# Altium PCB RD.PcbDoc (part 1 of 2)
Units mm, origin at the board's own origin, x right, y up, seen from the top; angles counter-clockwise.
Board outline 101.86 x 119 mm, 4 copper layers (Top Layer, VCC, GND, Bottom Layer); 150 components, 96 nets, 593 pads, 207 vias.
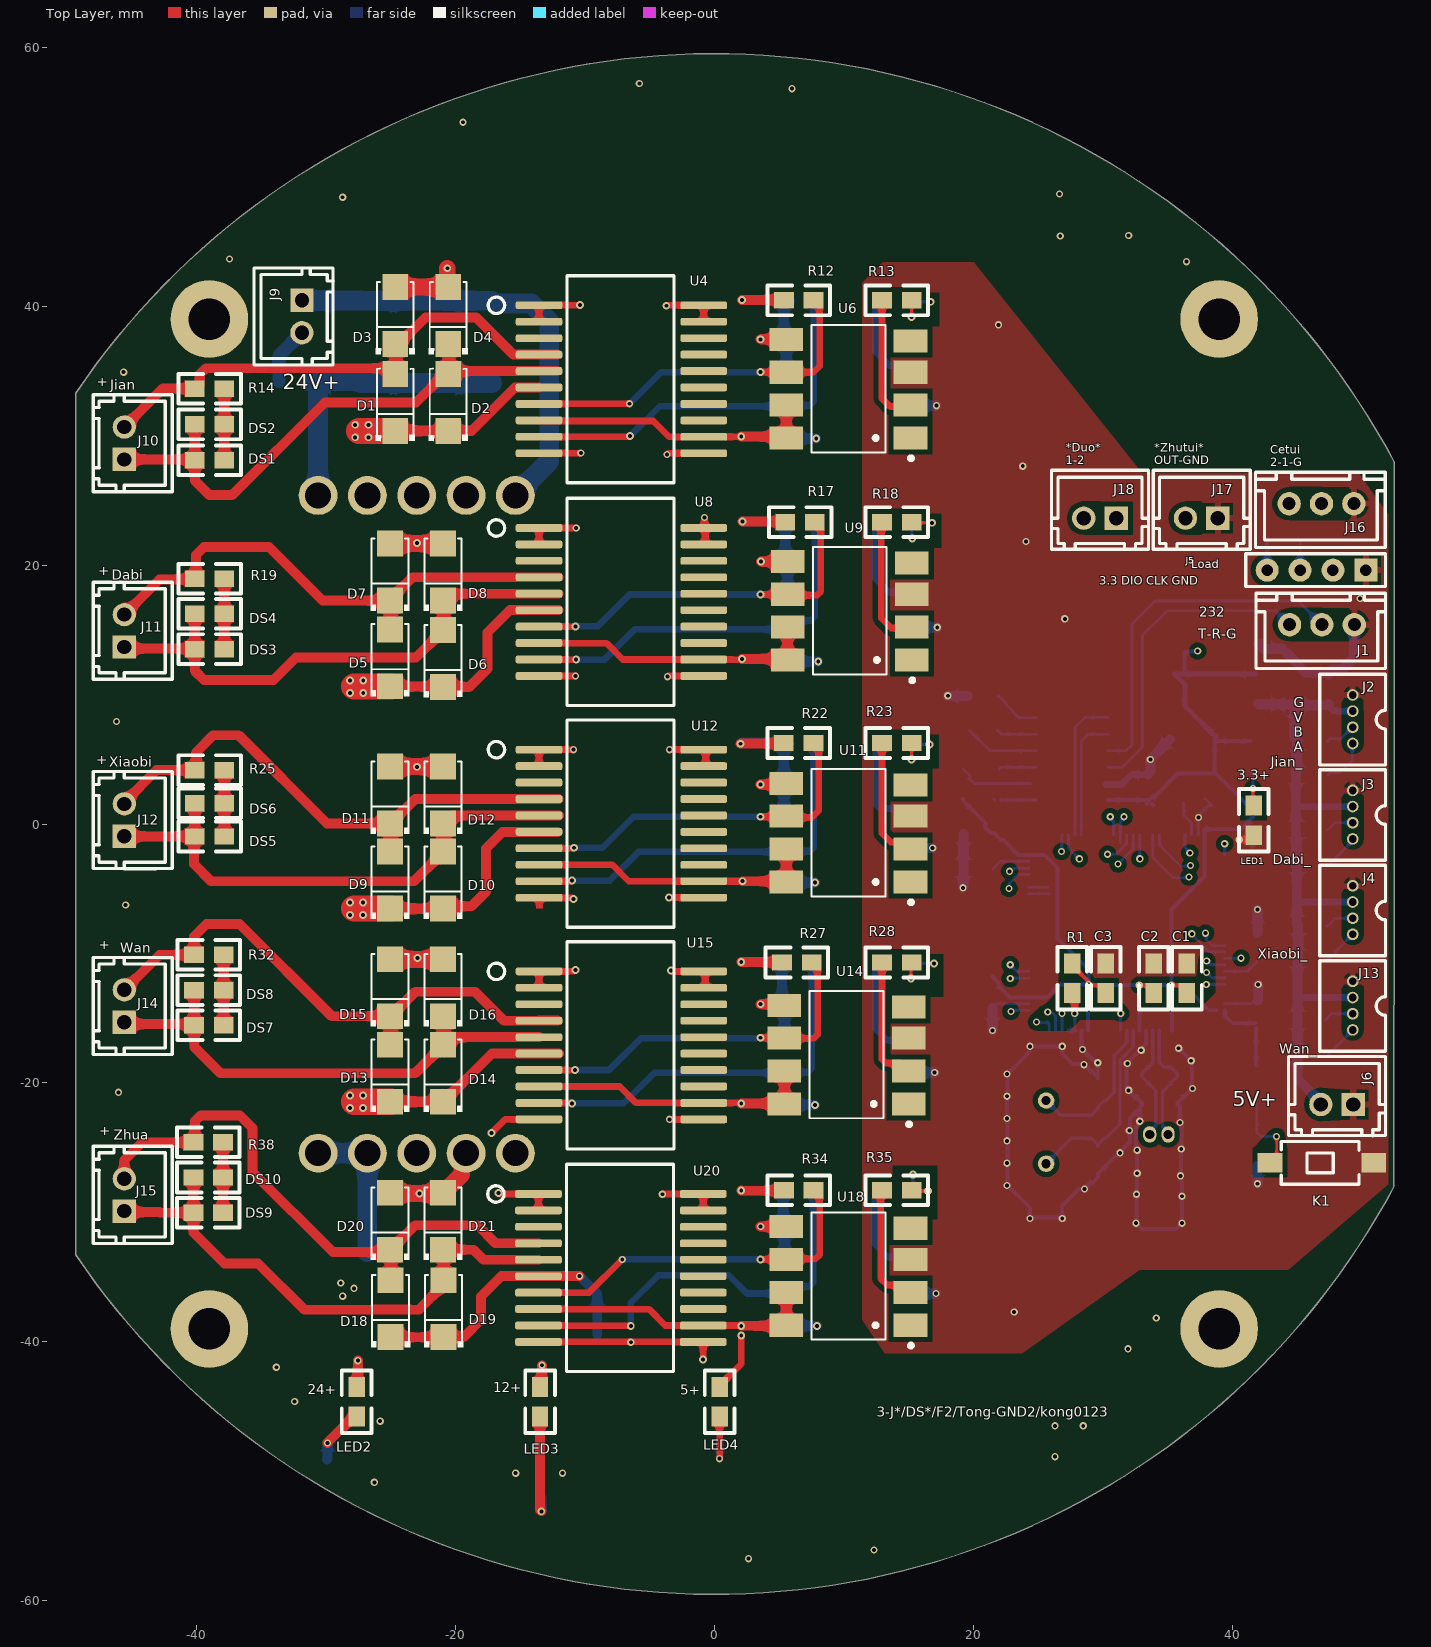
[diagram p0: Top Layer view]
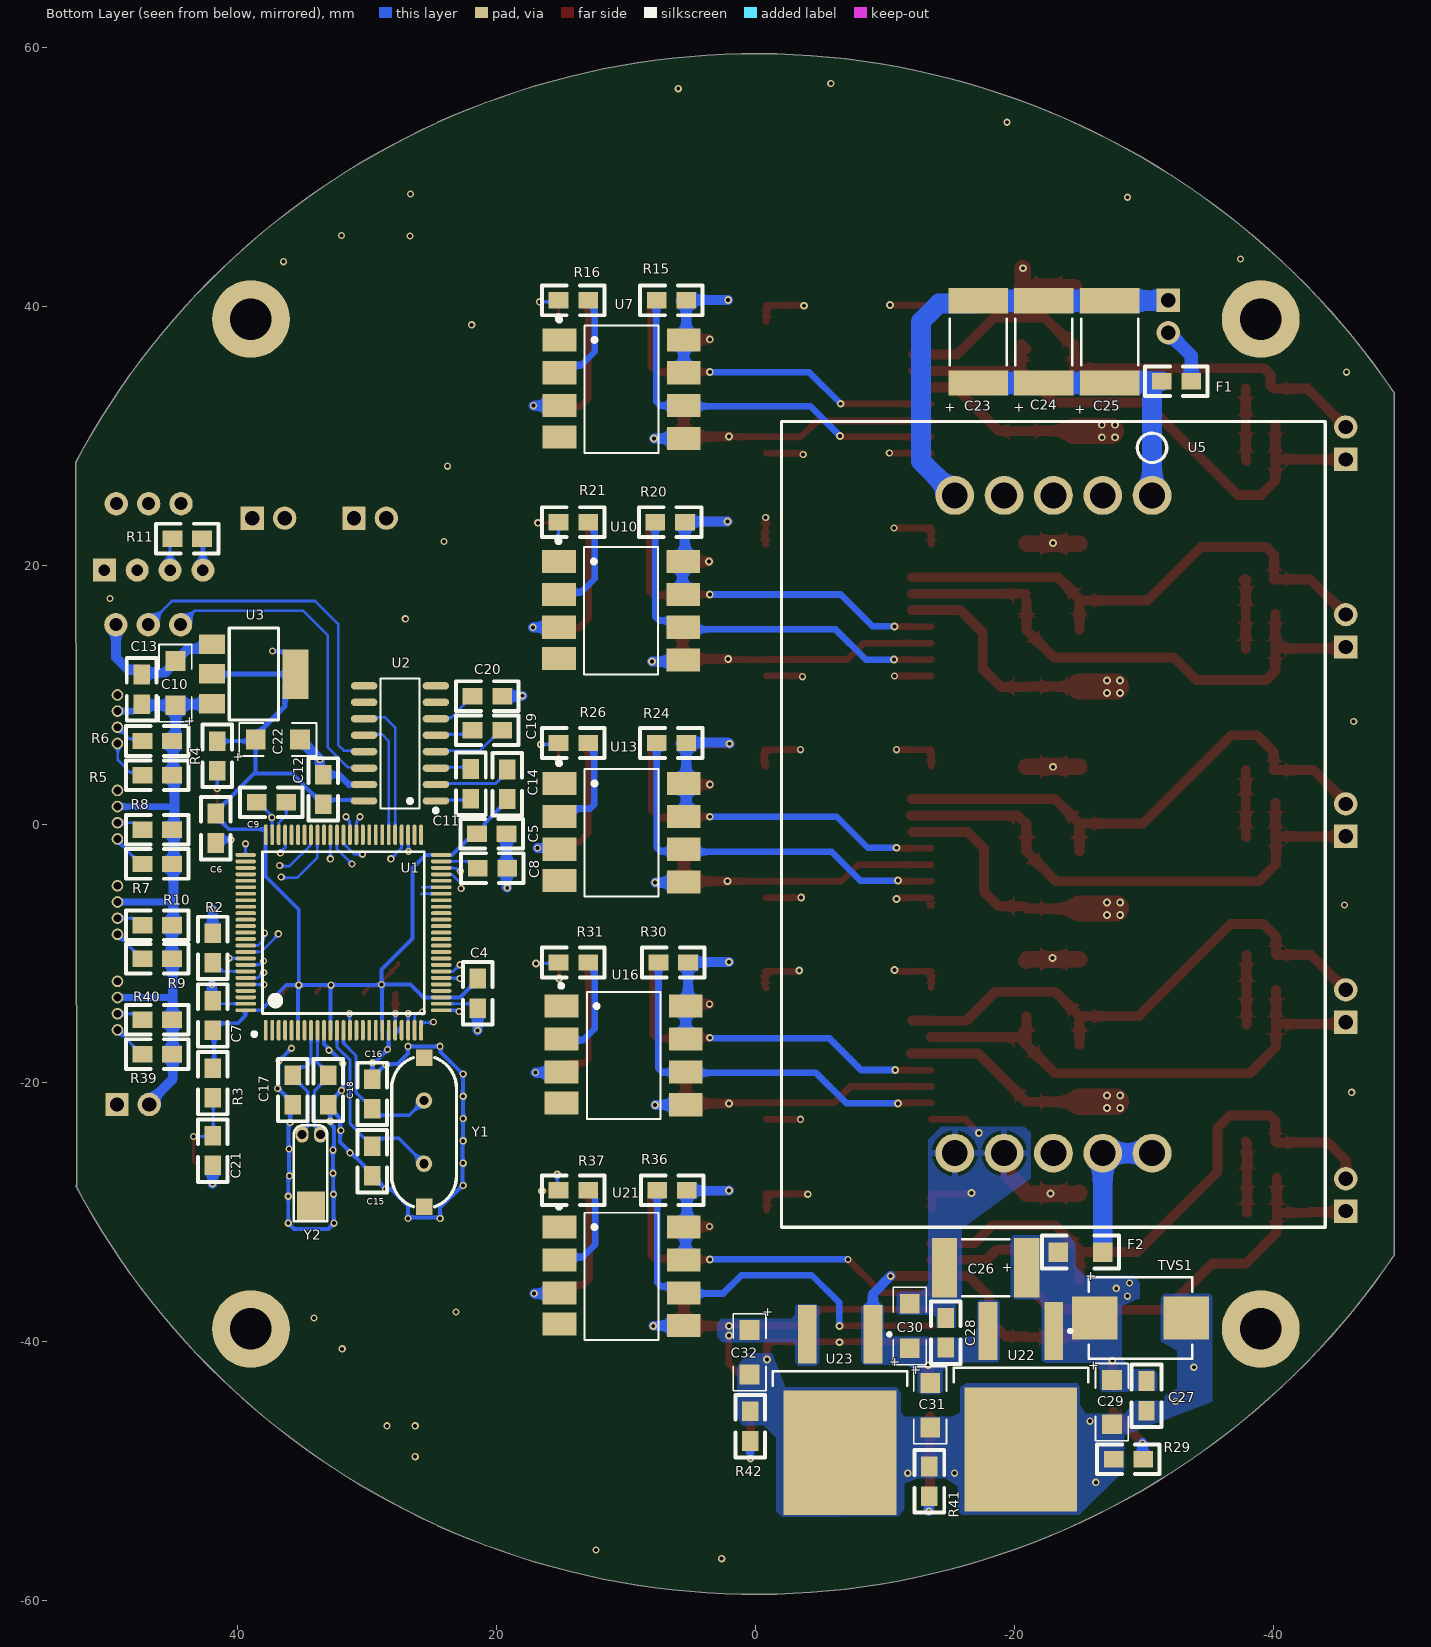
[diagram p1: Bottom Layer view, seen from below]
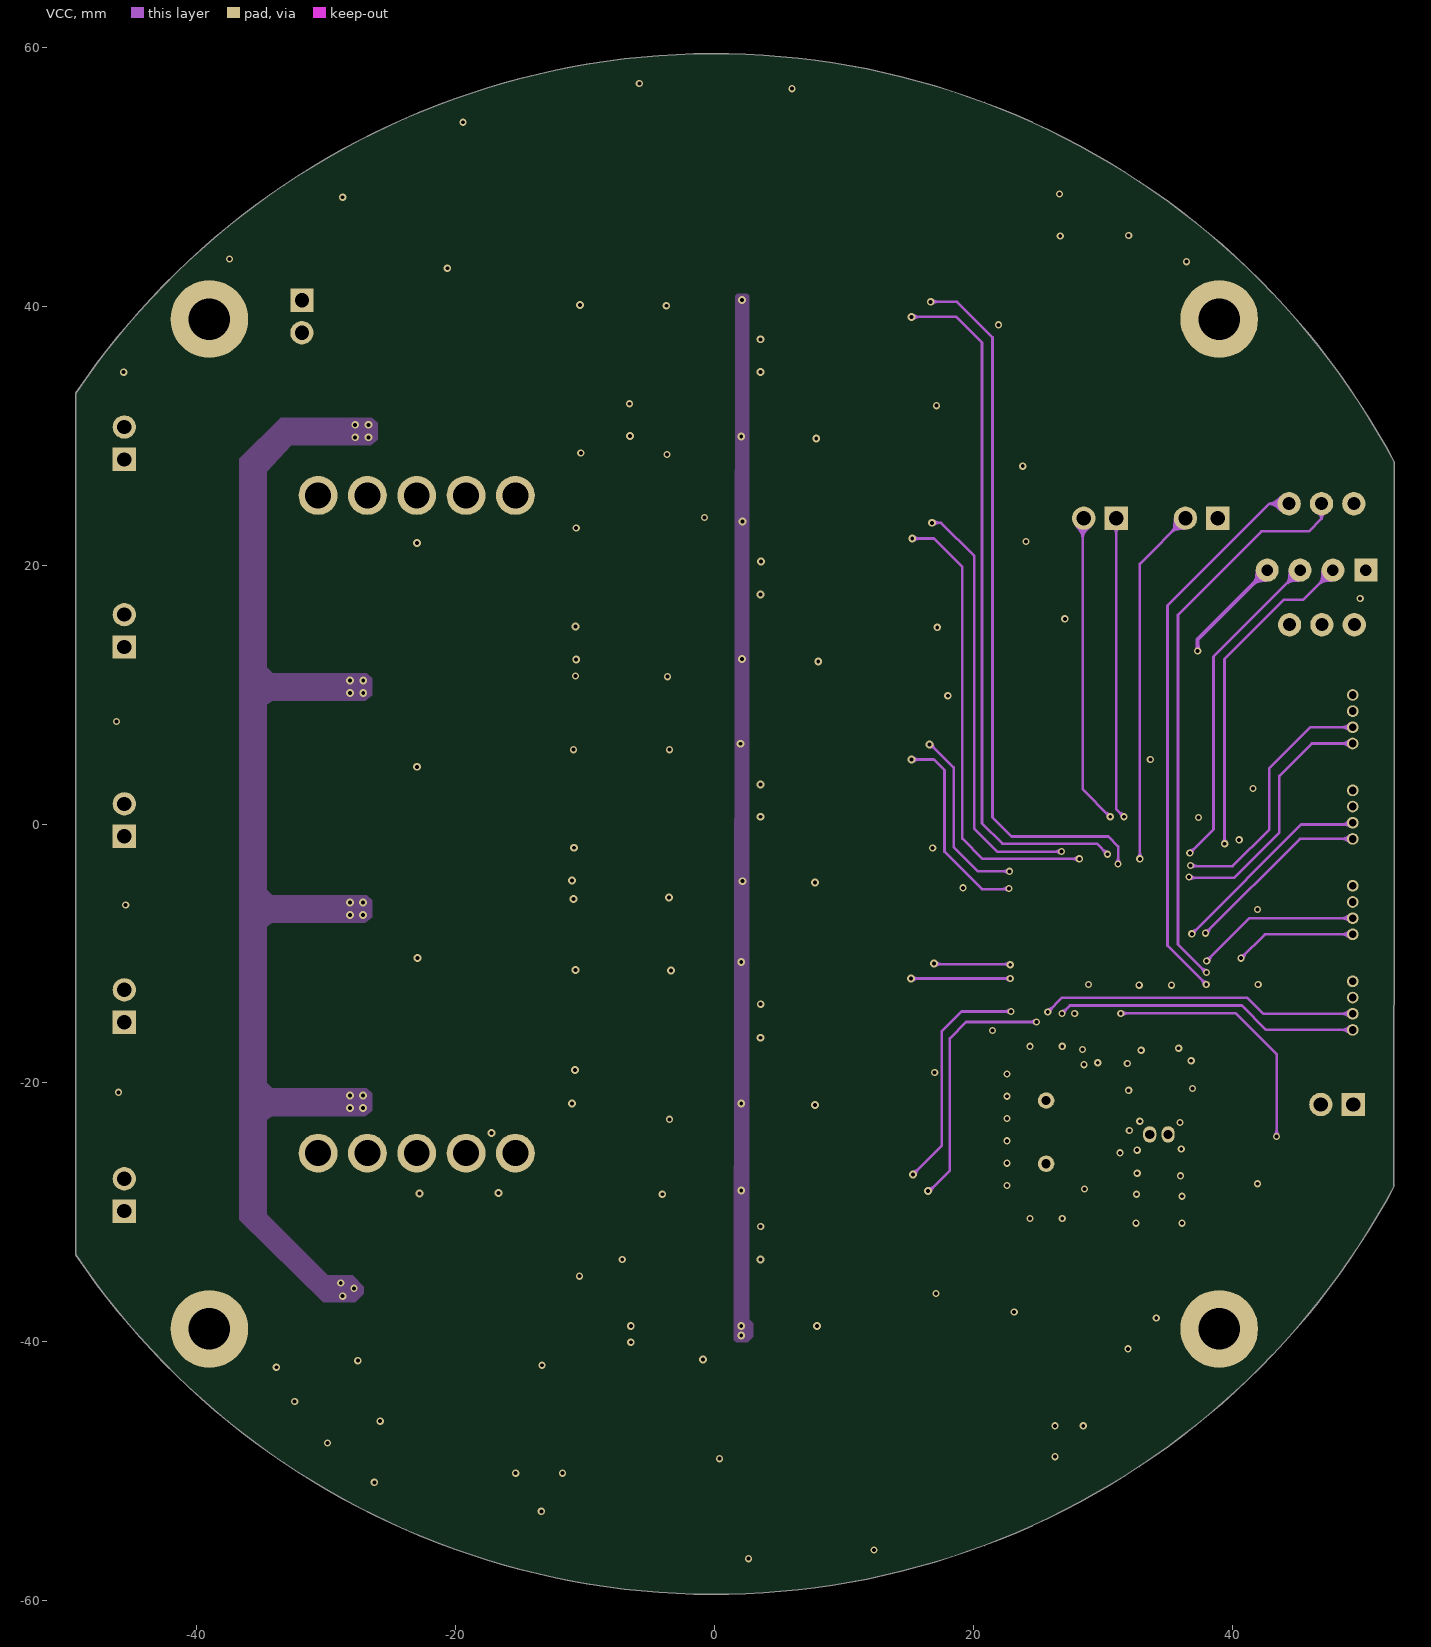
[diagram p2: VCC]
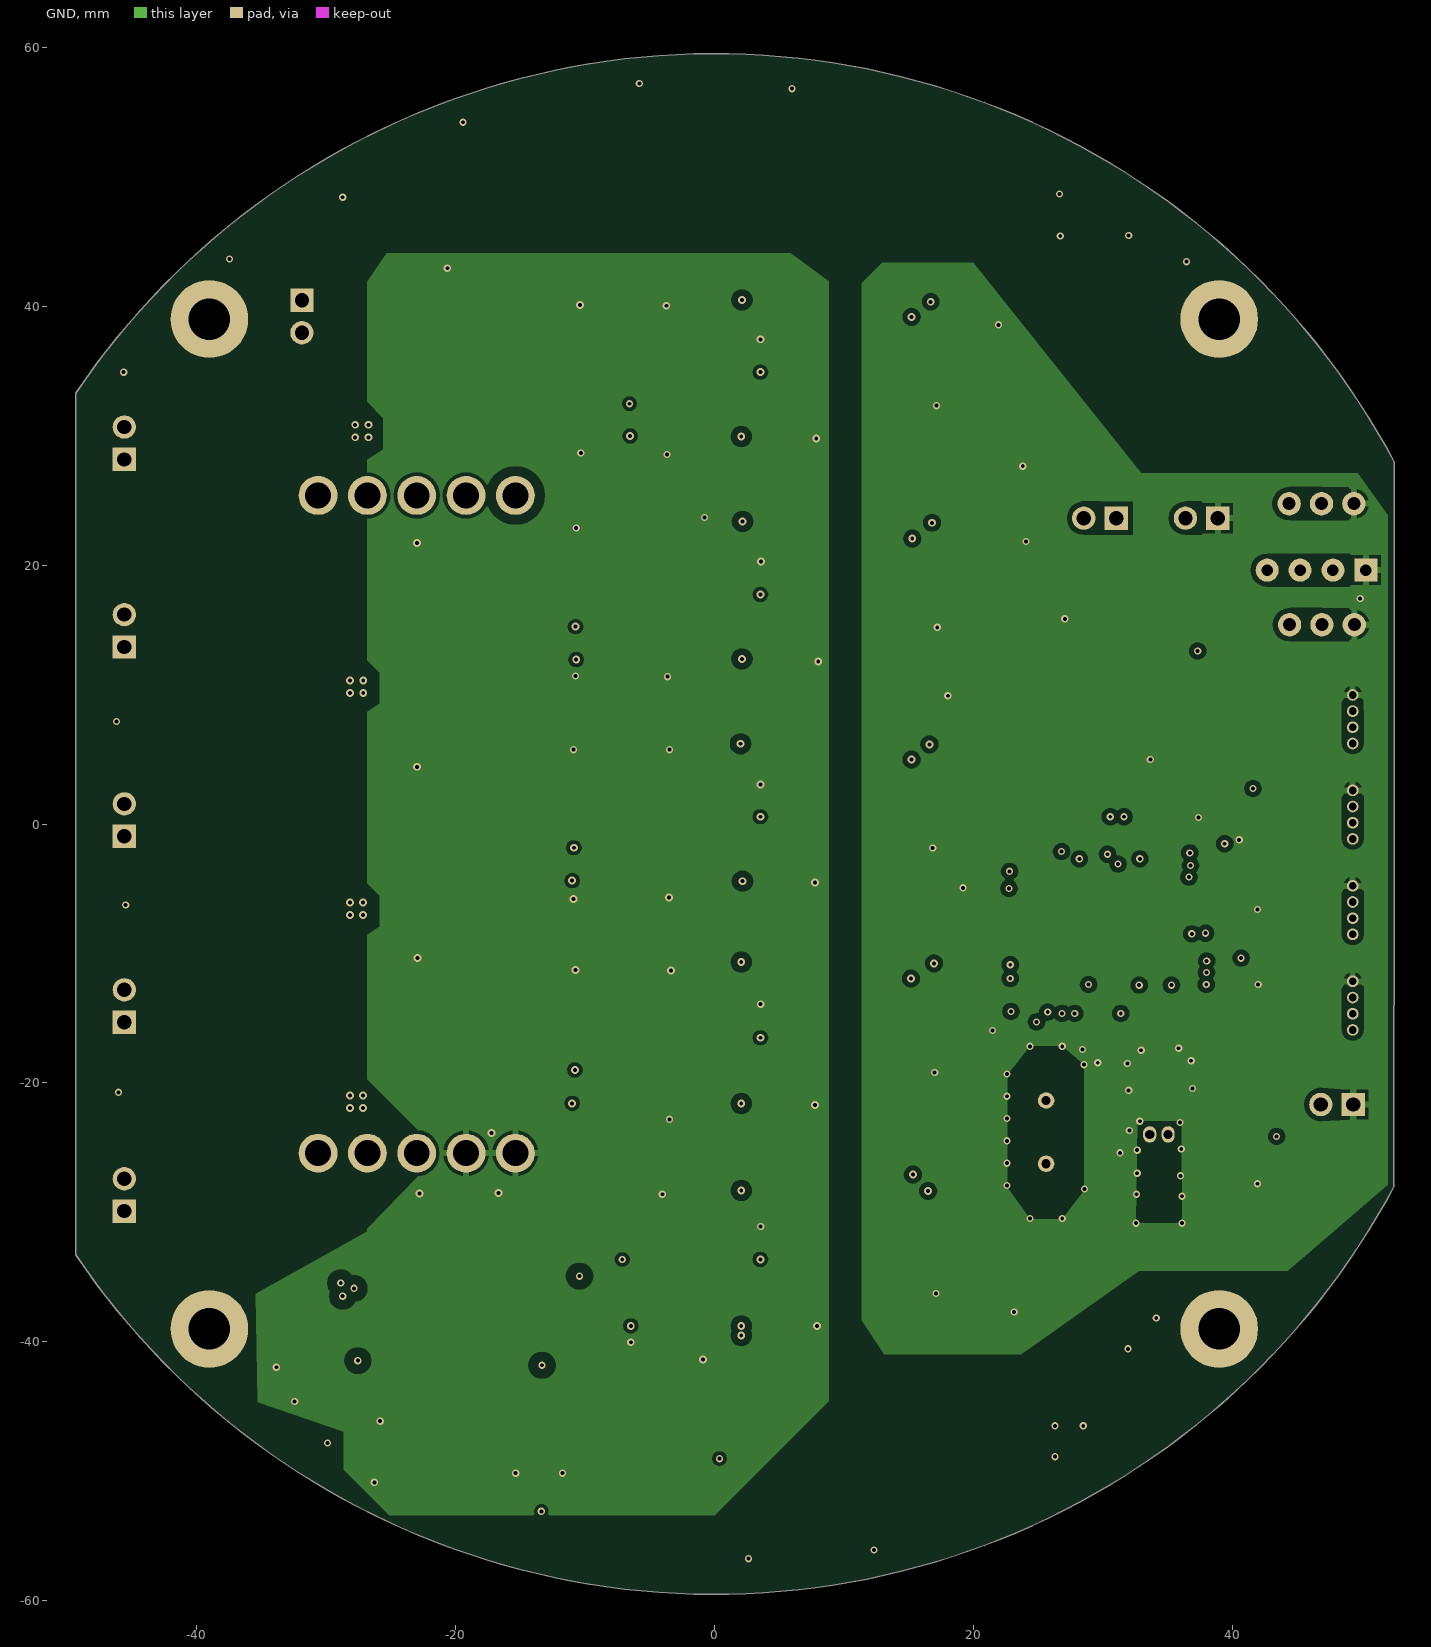
[diagram p3: GND]

## Layer stack, top to bottom
Top Solder: solder mask 0.0102, Solder Resist, Dk 3.5
Top Layer: signal copper 0.0356
Dielectric1: core 0.32, FR-4, Dk 4.8
VCC: signal copper 0.0356
Dielectric2: prepreg 0.32, FR-4, Dk 4.8
GND: signal copper 0.0356
Dielectric3: core 0.32, FR-4, Dk 4.8
Bottom Layer: signal copper 0.0356
Bottom Solder: solder mask 0.0102, Solder Resist, Dk 3.5

## Board outline
-49.328,-33.272 -49.328,33.272 cw(c0,0) 52.535,27.934 52.5,0 52.465,-27.934 52.535,-27.934 cw(c0,0)

## Design rules (kind name [scope] priority, off if disabled: settings)
Clearance GND1 [InNet('GND1')] p1: gap=0.381 ignorepadtopadclearanceinfootprint=TRUE
Clearance netcf [InNet('NetF1_1')  or InNet('NetC23_1')or InNet('NetC23_2')] p2: gap=0.762 ignorepadtopadclearanceinfootprint=TRUE
Clearance 3.3 [InNet('+3.3V')] p3: gap=0.381 ignorepadtopadclearanceinfootprint=TRUE
Clearance +5V [InNet('+5V')] p4: gap=0.508 ignorepadtopadclearanceinfootprint=TRUE
Clearance V5 [InNet('VCC_5V')] p5: gap=0.508 ignorepadtopadclearanceinfootprint=TRUE
Clearance Polygon [InNet('VCC_24V') or InNet('OUT1') or  InNet('OUT2') or  InNet('OUT3') or  InNet('OUT4') or  InNet('OUT5') or  InNet('OUT6') or  InNet('OUT7') or  InNet('OUT8') or  InNet('OUT9') or  InNet('OUT10') OR InNet('VCC_12V')] p6: gap=0.762 ignorepadtopadclearanceinfootprint=TRUE except(0.305: THPad-THPad THPad-Fill THPad-Poly THPad-Region)
Clearance [All] p7: gap=0.279 ignorepadtopadclearanceinfootprint=TRUE
FabricationTestPointUsage TestPointUsage [All] p1: valid=0 allowmultiple=FALSE
FabricationTestpoint Testpoint [All] p1: side=3 testpointundercomponent=TRUE minsize=1.016 maxsize=2.54 preferedsize=1.524 minholesize=0 maxholesize=1.016 preferedholesize=0.813 testpointgrid=0.025 allowsidetop=TRUE allowsidebottom=TRUE usegrid=TRUE gridtolerance=0
HoleSize [All] p1: absolutevalues=TRUE maxlimit=3.81 minlimit=0.254 maxpercent=80.000 minpercent=20.000
MinimumSolderMaskSliver [All] p1: minsoldermaskwidth=0.051
PlaneClearance [InNet('GND1')] p1: clearance=0.254
PolygonConnect PGND2B [OnBottomLayer{ InNet('GND2') }] p1: thpad.connectstyle=Relief thpad.reliefconductorwidth=0.508 thpad.reliefentries=4 thpad.polygonreliefangle="90 Angle" thpad.airgapwidth=0.254 smdpad.connectstyle=Direct smdpad.reliefconductorwidth=0.254 smdpad.reliefentries=4 smdpad.polygonreliefangle="90 Angle" smdpad.airgapwidth=0.254 via.connectstyle=Direct via.reliefconductorwidth=0.254 via.reliefentries=4 via.polygonreliefangle="90 Angle" via.airgapwidth=0.254
PolygonConnect PV24 [InNet('VCC_24V')] p2: thpad.connectstyle=Relief thpad.reliefconductorwidth=1.27 thpad.reliefentries=4 thpad.polygonreliefangle="90 Angle" thpad.airgapwidth=0.203 smdpad.connectstyle=Direct smdpad.reliefconductorwidth=0.762 smdpad.reliefentries=4 smdpad.polygonreliefangle="90 Angle" smdpad.airgapwidth=0.305 via.connectstyle=Direct via.reliefconductorwidth=0.254 via.reliefentries=4 via.polygonreliefangle="90 Angle" via.airgapwidth=0.254
PolygonConnect PV12 [InNet('VCC_12V')] p3: thpad.connectstyle=Relief thpad.reliefconductorwidth=0.254 thpad.reliefentries=4 thpad.polygonreliefangle="90 Angle" thpad.airgapwidth=0.254 smdpad.connectstyle=Direct smdpad.reliefconductorwidth=0.254 smdpad.reliefentries=4 smdpad.polygonreliefangle="90 Angle" smdpad.airgapwidth=0.254 via.connectstyle=Direct via.reliefconductorwidth=0.254 via.reliefentries=4 via.polygonreliefangle="90 Angle" via.airgapwidth=0.254
PolygonConnect PV5 [InNet('VCC_5V')] p4: connectstyle=Direct reliefconductorwidth=0.254 reliefentries=4 polygonreliefangle="90 Angle" airgapwidth=0.254
PolygonConnect PGND1 [InNet('GND1')] p5: thpad.connectstyle=Relief thpad.reliefconductorwidth=0.508 thpad.reliefentries=4 thpad.polygonreliefangle="90 Angle" thpad.airgapwidth=0.254 smdpad.connectstyle=Direct smdpad.reliefconductorwidth=0.305 smdpad.reliefentries=4 smdpad.polygonreliefangle="90 Angle" smdpad.airgapwidth=0.254 via.connectstyle=Direct via.reliefconductorwidth=0.305 via.reliefentries=4 via.polygonreliefangle="90 Angle" via.airgapwidth=0.254
PolygonConnect PGND2D [InComponent('D3')or  InComponent('D4') or InComponent('D7')or InComponent('D8')or InComponent('D11')or InComponent('D12')or InComponent('D15')or InComponent('D16')or InComponent('D20')or InComponent('D21')or  InComponent('C3')or  InComponent('C2')or   InComponent('C1')] p6: connectstyle=Direct reliefconductorwidth=0.254 reliefentries=4 polygonreliefangle="90 Angle" airgapwidth=0.254
PolygonConnect PGND2 [InNet('GND2')] p7: thpad.connectstyle=Relief thpad.reliefconductorwidth=0.508 thpad.reliefentries=4 thpad.polygonreliefangle="90 Angle" thpad.airgapwidth=0.254 smdpad.connectstyle=Relief smdpad.reliefconductorwidth=0.508 smdpad.reliefentries=4 smdpad.polygonreliefangle="90 Angle" smdpad.airgapwidth=0.254 via.connectstyle=Direct via.reliefconductorwidth=0.305 via.reliefentries=4 via.polygonreliefangle="90 Angle" via.airgapwidth=0.305
PolygonConnect [All] p8: connectstyle=Relief reliefconductorwidth=0.254 reliefentries=4 polygonreliefangle="90 Angle" airgapwidth=0.254
RoomDefinition RD [InComponentClass('RD')] p1: confinementstyle=ConfineIn formatcopy=TRUE lockcomponents=FALSE outline -118.11,-226.695 -67.31,-226.695 -67.31,-201.295 -118.11,-201.295
RoutingVias [All] p1: holewidth=0.191 width=0.381 viastyle="Through Hole" minholewidth=0.127 minwidth=0.254 maxholewidth=0.711 maxwidth=1.27
SilkToSilkClearance [All] p1: silktosilkclearance=0.025
SilkToSolderMaskClearance SilkscreenOverComponentPads [IsPad] p1: minsilkscreentomaskgap=0.025 clearancetoexposedcopper=TRUE
SolderMaskExpansion [All] p1: expansion=0.102 istentingtop=FALSE
Width [All] p1: maxlimit=5.08 minlimit=0.203 preferedwidth=0.254 toplayer_prefwidth=0.203 minimp=50.000000 maximp=50.000000 favimp=50.000000
23 further rules are at their usual default settings.

## Components (designator, comment, footprint, x,y, rotation, side; value= is the part's Value field where it differs from the comment)
C1 "104" 0805 36.508,-13.054 r90 top
C2 "104" 0805 33.934,-13.054 r90 top
C3 "104" 0805 30.226,-13.054 r90 top
C4 "104" 0805 21.488,-11.938 r270 bottom
C5 "104" 0805 21.539,-0.762 r180 bottom
C6 "104" 0805 41.707,0.813 r270 bottom
C7 "104" 0805 41.961,-15.934 r90 bottom
C8 "4.7uF" 0805 19.202,-3.404 r0 bottom
C9 "4.7uF" 0805 38.557,1.676 r180 bottom
C10 "Cap Pol1" 钽电容小 44.704,10.82 r270 bottom value=10uF
C11 "104" 0805 22.005,4.243 r270 bottom
C12 "104" 0805 33.426,1.524 r90 bottom
C13 "104" 0805 47.447,11.544 r270 bottom
C14 "104" 0805 19.202,4.216 r270 bottom
C15 "22pF" 0805 29.616,-27.178 r90 bottom
C16 "22pF" 0805 29.616,-19.71 r270 bottom
C17 "22pF" 0805 35.763,-21.692 r90 bottom
C18 "22pF" 0805 33.02,-21.692 r90 bottom
C19 "104" 0805 21.878,7.241 r180 bottom
C20 "104" 0805 19.592,9.882 r0 bottom
C21 "104" 0805 41.961,-24.079 r270 bottom
C22 "Cap Pol1" 钽电容小 36.982,6.401 r0 bottom value=10uF
C23 "Cap Pol1" 钽电容大 -17.17,37.236 r180 bottom value=22uF
C24 "Cap Pol1" 钽电容大 -22.25,37.236 r180 bottom value=100uF
C25 "Cap Pol1" 钽电容大 -27.33,37.236 r180 bottom value=100uF
C26 "Cap Pol1" 钽电容大 -17.755,-34.29 r90 bottom value=100uF
C27 "0.1uF" 0805 -30.175,-45.314 r90 bottom
C28 "0.1uF" 0805 -14.681,-38.151 r270 bottom
C29 "Cap Pol1" 钽电容小 -27.381,-44.59 r90 bottom value=2.2uF
C30 "Cap Pol1" 钽电容小 -12.014,-38.837 r270 bottom value=1uF
C31 "Cap Pol1" 钽电容小 -13.335,-44.831 r90 bottom value=2.2uF
C32 "Cap Pol1" 钽电容小 0.61,-40.742 r90 bottom value=1uF
D1 "Diode 1N4149" 肖特基二极管SS34 -24.616,32.563 r90 top
D2 "Diode 1N4149" 肖特基二极管SS34 -20.523,32.563 r90 top
D3 "Diode 1N4149" 肖特基二极管SS34 -24.616,39.268 r90 top
D4 "Diode 1N4149" 肖特基二极管SS34 -20.523,39.268 r90 top
D5 "Diode 1N4149" 肖特基二极管SS34 -25.023,12.837 r90 top
D6 "Diode 1N4149" 肖特基二极管SS34 -20.93,12.786 r90 top
D7 "Diode 1N4149" 肖特基二极管SS34 -25.023,19.455 r90 top
D8 "Diode 1N4149" 肖特基二极管SS34 -20.93,19.455 r90 top
D9 "Diode 1N4149" 肖特基二极管SS34 -25.023,-4.333 r90 top
D10 "Diode 1N4149" 肖特基二极管SS34 -20.93,-4.333 r90 top
D11 "Diode 1N4149" 肖特基二极管SS34 -25.023,2.234 r90 top
D12 "Diode 1N4149" 肖特基二极管SS34 -20.93,2.234 r90 top
D13 "Diode 1N4149" 肖特基二极管SS34 -25.023,-19.253 r90 top
D14 "Diode 1N4149" 肖特基二极管SS34 -20.93,-19.253 r90 top
D15 "Diode 1N4149" 肖特基二极管SS34 -25.023,-12.65 r90 top
D16 "Diode 1N4149" 肖特基二极管SS34 -20.93,-12.65 r90 top
D18 "Diode 1N4149" 肖特基二极管SS34 -24.972,-37.44 r90 top
D19 "Diode 1N4149" 肖特基二极管SS34 -20.879,-37.44 r90 top
D20 "Diode 1N4149" 肖特基二极管SS34 -25.023,-30.683 r90 top
D21 "Diode 1N4149" 肖特基二极管SS34 -20.93,-30.683 r90 top
DS1 "LED" 0805 -40.132,28.092 r0 top
DS2 "LED" 0805 -37.846,30.861 r180 top
DS3 "LED" 0805 -40.132,13.513 r0 top
DS4 "LED" 0805 -37.846,16.231 r180 top
DS5 "LED" 0805 -40.132,-0.965 r0 top
DS6 "LED" 0805 -37.846,1.6 r180 top
DS7 "LED" 0805 -40.183,-15.545 r0 top
DS8 "LED" 0805 -37.897,-12.827 r180 top
DS9 "LED" 0805 -40.234,-30.023 r0 top
DS10 "LED" 0805 -37.948,-27.305 r180 top
F1 "THERMAL FUSE" 0805 -33.63,34.188 r0 bottom
F2 "THERMAL FUSE" 1206 -26.797,-33.071 r0 bottom
J1 "CON3" CON3BB 46.932,15.392 r180 top
J2 "CON4" CON4B 49.31,8.103 r270 top
J3 "CON4" CON4B 49.31,0.732 r270 top
J4 "CON4" CON4B 49.31,-6.639 r270 top
J5 "CON4" CON4 46.516,19.609 r0 top
J6 "CON2" CON2BB 48.1,-21.665 r180 top
J9 "CON2" CON2BB -31.852,39.197 r270 top
J10 "CON2" CON2BB -45.568,29.413 r90 top
J11 "CON2" CON2BB -45.568,14.922 r90 top
J12 "CON2" CON2BB -45.568,0.305 r90 top
J13 "CON4" CON4B 49.31,-14.019 r270 top
J14 "CON2" CON2BB -45.568,-14.059 r90 top
J15 "CON2" CON2BB -45.568,-28.651 r90 top
J16 "CON3" CON3BB 46.899,24.74 r180 top
J17 "CON2" CON2BB 37.643,23.622 r180 top
J18 "CON2" CON2BB 29.789,23.622 r180 top
K1 "KEY4" 按钮 46.801,-26.213 r0 top
LED1 "LED" 0805 41.656,1.422 r270 top
LED2 "LED" 0805 -27.635,-43.485 r270 top
LED3 "LED" 0805 -13.462,-43.485 r270 top
LED4 "LED" 0805 0.406,-43.485 r270 top
R1 "10R" 0805 27.635,-13.054 r90 top
R2 "10K" 0805 41.961,-10.719 r90 bottom
R3 "1.5K" 0805 41.961,-21.15 r90 bottom
R4 "10K" 0805 41.605,4.115 r90 bottom
R5 "10K" 0805 47.38,3.771 r180 bottom
R6 "10K" 0805 47.38,6.412 r180 bottom
R7 "10K" 0805 47.38,-3.087 r180 bottom
R8 "10K" 0805 47.38,-0.446 r180 bottom
R9 "10K" 0805 47.38,-10.403 r180 bottom
R10 "10K" 0805 47.38,-7.812 r180 bottom
R11 "10K" 0805 45.06,22.047 r180 bottom
R12 "332" 0805 5.377,40.438 r0 top
R13 "201" 0805 15.24,40.438 r180 top
R14 "10K" 0805 -37.846,33.63 r180 top
R15 "332" 0805 5.377,40.438 r0 bottom
R16 "201" 0805 15.24,40.438 r180 bottom
R17 "332" 0805 5.479,23.322 r0 top
R18 "201" 0805 15.24,23.322 r180 top
R19 "10K" 0805 -37.846,18.948 r180 top
R20 "332" 0805 5.479,23.322 r0 bottom
R21 "201" 0805 15.24,23.322 r180 bottom
R22 "332" 0805 5.369,6.257 r0 top
R23 "201" 0805 15.24,6.257 r180 top
R24 "332" 0805 5.377,6.257 r0 bottom
R25 "10K" 0805 -37.846,4.166 r180 top
R26 "201" 0805 15.24,6.257 r180 bottom
R27 "332" 0805 5.233,-10.699 r0 top
R28 "201" 0805 15.24,-10.699 r180 top
R29 "Res2" 0805 -29.921,-49.073 r0 bottom value=10K
R30 "332" 0805 5.233,-10.699 r0 bottom
R31 "201" 0805 15.24,-10.699 r180 bottom
R32 "10K" 0805 -37.897,-10.109 r180 top
R34 "332" 0805 5.377,-28.279 r0 top
R35 "201" 0805 15.24,-28.279 r180 top
R36 "332" 0805 5.326,-28.279 r0 bottom
R37 "201" 0805 15.24,-28.279 r180 bottom
R38 "10K" 0805 -37.948,-24.587 r180 top
R39 "10K" 0805 47.38,-17.769 r180 bottom
R40 "10K" 0805 47.38,-15.127 r180 bottom
R41 "10K" 0805 -13.411,-51.918 r90 bottom
R42 "10K" 0805 0.445,-47.65 r90 bottom
TVS1 "TVS" TVS -29.708,-38.162 r270 bottom
U1 "STM32F407VGT6" STM32F407VGT6 31.825,-6.911 r180 bottom locked
U2 "MAX3232" MAX3232 27.381,6.096 r90 bottom
U3 "AMS1117-3.3_C347222" AMS1117 38.862,11.735 r270 bottom
U4 "L298P" L298P -7.181,34.223 r180 top
U5 "URF4824QB-200W" URF4824QB-200W（24稳压） -23.114,-0.152 r0 bottom locked
U6 "6n137" 6N137 10.363,33.071 r0 top
U7 "6n137" 6N137 10.372,34.136 r0 bottom
U8 "L298P" L298P -7.181,17.023 r180 top
U9 "6n137" 6N137 10.465,15.926 r0 top
U10 "6n137" 6N137 10.414,17.018 r0 bottom
U11 "6n137" 6N137 10.363,-1.219 r0 top
U12 "L298P" L298P -7.181,-0.102 r180 top
U13 "6n137" 6N137 10.372,-0.128 r0 bottom
U14 "6n137" 6N137 10.219,-18.364 r0 top
U15 "L298P" L298P -7.181,-17.227 r180 top
U16 "6n137" 6N137 10.211,-17.323 r0 bottom
U18 "6n137" 6N137 10.363,-35.458 r0 top
U20 "L298P" L298P -7.22,-34.419 r180 top
U21 "6n137" 6N137 10.372,-34.392 r0 bottom
U22 "7812" 7812 -20.472,-45.009 r180 bottom
U23 "7805" 7805 -6.502,-45.269 r180 bottom
Y1 "XTAL8" XTAL8（晶振） 25.756,-23.52 r90 bottom
Y2 "XTAL32-100" XTAL32-100（晶振） 34.392,-26.264 r270 bottom

## Footprints (in the part's own frame and the unit in brackets; to place one, negate y for a bottom-side part, rotate by r counter-clockwise, add the part's x,y. Pads: shape width x height; smd on the part's side, far side on the other; paste and mask are expansions set on the pad)
6N137 [mm]
  rect 2.6x1.78 smd mask+0.102: 1(4.796,-3.258) 2(4.796,-0.718) 3(4.796,1.822) 4(4.796,4.235) 5(-4.804,4.362) 6(-4.804,1.822) 7(-4.804,-0.718) 8(-4.804,-3.258)
  silkscreen extent -2.86,-4.98 4.98,5.47
0805 [mil]
  rect 60x50 smd: 1(0,0) 2(90,0)
  silkscreen extent -50,-45 140,45
1206 [mil]
  rect 60x60 smd: 1(0,0) 2(135,0)
  silkscreen extent -50,-50 185,50
7805 [mm]
  rect 1.45x4.5 smd: 1(2.54,5.848) 3(-2.54,5.848)
  rect 8.7x9.6 smd: 2(0,-3.302)
  silkscreen extent -5.2,1.9 5.2,5.97, body extent -5.2,-6.35 5.2,3, height 4.67
7812 [mm]
  rect 1.45x4.5 smd: 1(2.54,5.848) 3(-2.54,5.848)
  rect 8.7x9.6 smd: 2(0,-3.302)
  silkscreen extent -5.2,1.9 5.2,5.97, body extent -5.2,-6.35 5.2,3, height 4.67
AMS1117 [mil]
  rect 59x79 smd: 1(-84.88,-123.54) 2(5.67,-123.54) 3(96.22,-123.54)
  rect 150x79 smd: 4(6.34,130)
  silkscreen extent -134,-72 146,78
CON2BB [mm]
  rect 1.8x1.8 hole 1.1 paste+0 mask+0.05: 1(-1.25,0)
  round 1.8 hole 1.1 paste+0 mask+0.05: 2(1.25,0)
  silkscreen extent -3.75,-3.7 3.75,2.41
CON3BB [mm]
  round 1.8 hole 1 paste+0 mask+0.05: 1(-2.5,0) 2(0,0) 3(2.5,0)
  silkscreen extent -4.92,-2.44 5.09,3.38
CON4 [mil]
  rect 70x70 hole 35: 1(150,0)
  round 70 hole 35: 2(50,0) 3(-50,0) 4(-150,0)
  silkscreen extent -215,-50 210,50
CON4B [mm]
  round 0.9 hole 0.6: 1(1.885,0) 2(0.635,0) 3(-0.615,0) 4(-1.865,0)
  silkscreen extent -3.46,-2.54 3.54,2.54
L298P [mm]
  rrect50% 3.6x0.6 smd: 1(6.361,-5.842) 2(6.361,-4.572) 3(6.361,-3.302) 4(6.361,-2.032) 5(6.361,-0.762) 6(6.361,0.508) 7(6.361,1.778) 8(6.361,3.048) 9(6.361,4.318) 10(6.361,5.588) 11(-6.361,5.588) 12(-6.361,4.318) 13(-6.361,3.048) 14(-6.361,1.778) 15(-6.361,0.508) 16(-6.361,-0.762) 17(-6.361,-2.032) 18(-6.361,-3.302) 19(-6.361,-4.572) 20(-6.361,-5.842)
  silkscreen extent -4.06,-8.13 10.28,7.87
MAX3232 [mm]
  oval 0.574x2.038 smd mask+0.102: 1(-4.317,-2.664) 2(-3.047,-2.664) 3(-1.777,-2.664) 4(-0.507,-2.664) 5(0.763,-2.664) 6(2.033,-2.664) 7(3.303,-2.664) 8(4.573,-2.664) 9(4.573,2.874) 10(3.303,2.874) 11(2.033,2.874) 12(0.763,2.874) 13(-0.507,2.874) 14(-1.777,2.874) 15(-3.047,2.874) 16(-4.317,2.874)
  silkscreen extent -5.21,-2.81 5.15,1.63
STM32F407VGT6 [mm]
  oval 0.3x1.6 smd paste-100 mask+0.051: 1(-6.032,-9.026) 2(-5.532,-9.026) 3(-5.032,-9.026) 4(-4.532,-9.026) 5(-4.032,-9.026) 6(-3.532,-9.026) 7(-3.032,-9.026) 8(-2.532,-9.026) 9(-2.032,-9.026) 10(-1.532,-9.026) 11(-1.032,-9.026) 12(-0.532,-9.026) 13(-0.032,-9.026) 14(0.468,-9.026) 15(0.968,-9.026) 16(1.468,-9.026) 17(1.968,-9.026) 18(2.468,-9.026) 19(2.968,-9.026) 20(3.468,-9.026) 21(3.968,-9.026) 22(4.468,-9.026) 23(4.968,-9.026) 24(5.468,-9.026) 25(5.968,-9.026) 51(5.968,6.073) 52(5.468,6.073) 53(4.968,6.073) 54(4.468,6.073) 55(3.968,6.073) 56(3.468,6.073) 57(2.968,6.073) 58(2.468,6.073) 59(1.968,6.073) 60(1.468,6.073) 61(0.968,6.073) 62(0.468,6.073) 63(-0.032,6.073) 64(-0.532,6.073) 65(-1.032,6.073) 66(-1.532,6.073) 67(-2.032,6.073) 68(-2.532,6.073) 69(-3.032,6.073) 70(-3.532,6.073) 71(-4.032,6.073) 72(-4.532,6.073) 73(-5.032,6.073) 74(-5.532,6.073) 75(-6.032,6.073)
  oval 1.6x0.3 smd paste-100 mask+0.051: 26(7.518,-7.476) 27(7.518,-6.977) 28(7.518,-6.476) 29(7.518,-5.977) 30(7.518,-5.476) 31(7.518,-4.977) 32(7.518,-4.476) 33(7.518,-3.977) 34(7.518,-3.476) 35(7.518,-2.977) 36(7.518,-2.477) 37(7.518,-1.976) 38(7.518,-1.477) 39(7.518,-0.976) 40(7.518,-0.477) 41(7.518,0.024) 42(7.518,0.523) 43(7.518,1.024) 44(7.518,1.523) 45(7.518,2.024) 46(7.518,2.523) 47(7.518,3.024) 48(7.518,3.523) 49(7.518,4.024) 50(7.518,4.523) 76(-7.582,4.523) 77(-7.582,4.024) 78(-7.582,3.523) 79(-7.582,3.024) 80(-7.582,2.523) 81(-7.582,2.024) 82(-7.582,1.523) 83(-7.582,1.024) 84(-7.582,0.523) 85(-7.582,0.024) 86(-7.582,-0.477) 87(-7.582,-0.976) 88(-7.582,-1.477) 89(-7.582,-1.976) 90(-7.582,-2.476) 91(-7.582,-2.977) 92(-7.582,-3.476) 93(-7.582,-3.977) 94(-7.582,-4.476) 95(-7.582,-4.977) 96(-7.582,-5.476) 97(-7.582,-5.977) 98(-7.582,-6.476) 99(-7.582,-6.977) 100(-7.582,-7.476)
  silkscreen extent -7.06,-9.47 6.22,4.77
TVS [mm]
  rect 3.3x3.5 smd: 1(0,3.525) 2(0,-3.525)
  silkscreen extent -3.15,-4 3.15,4
URF4824QB-200W（24稳压） [mm]
  round 3 hole 2: 1(-7.493,-25.527) 2(-3.683,-25.527) 3(0.127,-25.527) 4(3.937,-25.527) 5(7.747,-25.527) 6(7.747,25.273) 7(3.937,25.273) 8(0.127,25.273) 9(-3.683,25.273) 10(-7.493,25.273)
  silkscreen extent -20.87,-31.24 21.13,30.99
XTAL8（晶振） [mil]
  round 50 hole 28: 1(-107.13,-5) 2(85,-5)
  rect 50x50 smd: ""(-237.44,-5) ""(215.31,-5)
  silkscreen extent -238,-103 216,93
XTAL32-100（晶振） [mil]
  oval 50x40 hole 28: 1(-90,-26) 2(-90,30)
  rect 92.13x86 smd: ""(130,1)
  silkscreen extent -118,-51 174,51
按钮 [mm]
  rect 1.9x1.5 smd mask+0.102: 1(-3.876,0.059) 2(4.124,0.059)
  silkscreen extent -3.01,-1.61 2.99,1.69
肖特基二极管SS34 [mm]
  rect 2x2 smd: 1(-2.2,0.029) 2(2.2,0.029)
  silkscreen extent -2.98,-1.47 2.6,1.53
钽电容大 [mm]
  rect 4.6x1.95 smd: 1(0,-3.175) 2(0,3.175)
  silkscreen extent -2.2,-1.8 2.2,1.8
钽电容小 [mil]
  rect 60x60 smd: 1(65,-5) 2(-70,-5)
  silkscreen extent -120,-55 115,45

## Part data
C1 C2 C3 C4 C5 C6 C7 C8 C9 C27 C28: library part Cap, "Capacitor", LatestRevisionDate=17-Jul-2002, LatestRevisionNote="Re-released for DXP Platform.", PackageDescription="Radial Cap, Thru-Hole; 2 Leads; 0.3 in Pin Spacing", PackageReference=RAD-0.3, Published=8-Jun-2000, Publisher="Altium Limited"
C10 C22 C23 C24 C25 C26 C29 C30 C31 C32: "Polarized Capacitor (Radial)", LatestRevisionDate=17-Jul-2002, LatestRevisionNote="Re-released for DXP Platform.", PackageDescription="Polarized Capacitor (Radial); 2 Leads", PackageReference=RB7.6-15, Published=8-Jun-2000, Publisher="Altium Limited"
C11 C12 C13 C14 C15 C16 C17 C18 C19 C20 C21: library part CAP
D1 D2 D3 D4 D5 D6 D7 D8 D9 D10 D11 D12 D13 D14 D15 D16 D18 D19 D20 D21: "Computer Diode", Code_JEDEC=DO-204-AH, ComponentLink1Description="Manufacturer Link", ComponentLink1URL=http://www.national.com/, DatasheetVersion=1989, LatestRevisionDate=17-Jul-2002, LatestRevisionNote="Re-released for DXP Platform.", PackageDescription="Diode, Axial; Body 4.6 x 1.9 mm (LxDia. max), Lead Dia. 0.53 mm (max)", PackageReference=DO-35A, PackageVersion=1989, Published=8-Jun-2000, Publisher="Altium Limited"
DS1 DS2 DS3 DS4 DS5 DS6 DS7 DS8 DS9 DS10 LED1 LED2 LED3 LED4: PackageDocument=Feb-2002, LatestRevisionDate=17-Jul-2002, LatestRevisionNote="Re-released for DXP Platform.", PackageReference=3.2X1.6X1.1, Published=8-Jun-2000, Publisher="Altium Limited"
R1 R2 R4 R5 R6 R7 R8 R9 R10 R12 R13 R14 R15 R16 R17 R18 R19 R20 R21 R22 R23 R24 R25 R26 R27 R28 R30 R31 R32 R34 R35 R36 R37 R38 R39 R40 R41 R42: library part Res2, "Resistor", LatestRevisionDate=17-Jul-2002, LatestRevisionNote="Re-released for DXP Platform.", PackageDescription="Axial Device, Thru-Hole; 2 Leads; 0.4 in Pin Spacing", PackageReference=AXIAL-0.4, Published=8-Jun-2000, Publisher="Altium Limited"
R3 R11: library part RES
R29: "Resistor", LatestRevisionDate=17-Jul-2002, LatestRevisionNote="Re-released for DXP Platform.", PackageDescription="Axial Device, Thru-Hole; 2 Leads; 0.4 in Pin Spacing", PackageReference=AXIAL-0.4, Published=8-Jun-2000, Publisher="Altium Limited"
TVS1: library part 稳压二极管, "Zener Diode"
U1: "ARM Cortex-M4 32b MCU+FPU, 210DMIP, 1024 kB Flash, 192+4 kB RAM, Camera, 82 I/Os, 100-pin LQFP, -40 to +85癈, Tray", Operating Frequency (Processor Speed)=168MHz, 16-bit Timers (IC/OC/PWM)=12x16-bit(24/24/30), 32-bit Timer (IC/OC/PWM)="2x32-bit (8/8/8)", A/D Converter=16x12-bit, ComponentLink1Description="Manufacturer URL", ComponentLink1URL=http://www.st.com/, ComponentLink2Description="STM32F405/7 Datasheet", ComponentLink2URL=http://www.st.com/internet/com/TECHNICAL_RESOURCES/TECHNICAL_LITERATURE/DATASHEET/DM00037051.pdf, ComponentLink3Description="STM32F4 Web Page", ComponentLink3URL=http://www.st.com/internet/mcu/subclass/1521.jsp, D/A Converter=2x12-bit, DatasheetVersion="rev2, Jan-2012", Internal RAM=192kB, Other Timer Functions="2xWDG, RTC, 24-bit down counter", PackageDescription="100-Pin Low Profile Quad Flat Package, 14x14 mm Body, 0.5 mm Pitch", PackageReference=LQFP100, PackageVersion=2012, Serial Interface="3xSPI/2xI2S/2xI2C/3xUSART(IrDa, ISO7816)/3xUART/2xUSB OTG FS/HS, 2xCAN/Ethernet MAC10/100, SDIO"
U3: Dropout Voltage=1.3V@(1A), JLCPCB Part Class="Extended Part", LCSC Part Name=AMS1117-3.3, Manufacturer=UMW(广东友台半导体), Maximum Input Voltage=18V, Output Current=1A, Output Voltage=3.3V, Power Supply Rejection Ratio (PSRR)=60dB@(120Hz), Add into BOM=yes, Convert to PCB=yes, Datasheet=https://atta.szlcsc.com/upload/public/pdf/source/20211011/50CC665C22E3A66C08379A4A74BDA25C.pdf, Device=AMS1117-3.3_C347222, Manufacturer Part=AMS1117-3.3, Name=AMS1117-3.3, Number of Outputs=1, Output Polarity=正, Output Type=固定, Supplier=LCSC, Supplier Footprint=SOT-223, Supplier Part=C347222, Symbol=AMS1117-3.3_C347222
U22: library part L7912CV
Y1 Y2: LatestRevisionDate=17-Jul-2002, LatestRevisionNote="Re-released for DXP Platform.", Published=8-Jun-2000, Publisher="Altium Limited"

## Free pads (board coordinates)
  round 6 hole 3.2: 0(39,39) 1(-39,39) 2(39,-39) 3(-39,-39)

## Via types
v1: diameter 0.559, hole 0.305, Top Layer to Bottom Layer, 135 vias
v2: diameter 0.61, hole 0.305, Top Layer to Bottom Layer, 72 vias

## Nets (pads, with @x,y where several pads share a name; then routed paths per layer and width w, separated by ;. In a path a pad name is that pad's centre, name@x,y a point inside that pad or via, vN(x,y) a via of type N, cw(c..) or ccw(c..) an arc to the next point about the centre after c; other vN are vias at no path point)
+3.3V: C1.1 C2.1 C3.1 C4.1 C5.1 C6.1 C7.1 C12.1 C14.2 C22.1 J5.4 R1.2 R3.2 R4.2 R11.2 U1.6 U1.11 U1.19 U1.28 U1.50 U1.75 U1.100 U2.16 U3.2 U3.4 | length 124.8
  Top Layer w0.305: R1.2@27.635,-10.768 27.635,-10.895 28.857,-12.116 ; v1(28.905,-12.395) 28.954,-12.444 C3.1@29.614,-12.444 ; C3.1@29.615,-12.444 29.743,-12.444 30.277,-12.978 C3.1@30.277,-13.106 ; v1(32.817,-12.446) 33.452,-12.446 33.934,-12.929 C2.1@33.934,-13.054 ; v1(35.306,-12.446) 36.026,-12.446 36.508,-12.929 C1.1@36.508,-13.054
  VCC w0.305: v1(37.338,13.36) 37.338,14.241 J5.4@42.706,19.609
  Bottom Layer w0.305: C14.2@19.202,1.93 19.202,1.803 20.93,0.076 20.93,-0.279 C5.1@21.361,-0.711 ; C4.1@21.488,-11.786 21.971,-12.268 21.971,-12.522 22.836,-13.387 U1.28@24.307,-13.387 24.309,-13.39 25.676,-13.39 26.67,-12.395 v1(28.905,-12.395) ; C5.1@21.59,-0.711 22.123,-1.245 22.327,-1.245 23.469,-2.387 U1.50@24.307,-2.387 25.501,-2.387 26.518,-3.404 26.518,-8.839 28.905,-11.227 v1(28.905,-12.395) ; U1.19@28.857,-15.937 28.859,-15.935 28.859,-12.441 v1(28.905,-12.395) ; U2.16@30.391,1.856 C12.1@33.632,1.856 ; U1.11@32.857,-15.937 32.854,-15.935 32.854,-12.484 v1(32.817,-12.446) ; C12.1@33.426,1.524 33.426,1.651 C12.1@33.632,1.856 ; C12.1@33.805,1.533 C12.1@33.909,1.43 ; U1.6@35.357,-15.937 35.357,-12.617 35.355,-12.614 35.355,-12.495 v1(35.306,-12.446) ; U3.4@36.322,11.574 36.322,13.238 36.411,13.326 37.304,13.326 v1(37.338,13.36) ; 38.633,4.013 C6.1@41.707,0.94 ; U1.100@38.759,-14.387 38.212,-14.387 36.271,-12.446 v1(35.306,-12.446) ; U1.100@39.407,-14.387 39.439,-14.387 39.441,-14.39 39.441,-14.818 40.014,-15.391 ; 40.115,-15.391 C7.1@41.792,-15.391 ; R4.2@41.402,6.401 38.76,6.401 C22.1@38.633,6.528 38.633,6.401 38.633,3.886 35.789,3.886 34.036,2.134 33.909,2.134 C12.1@33.632,1.856 ; C6.1@41.605,0.508 41.529,0.508 41.224,0.203 41.224,0.127 40.691,-0.406 37.859,-0.406 37.857,-0.409 37.857,-4.053 35.306,-6.604 v1(35.306,-12.446) ; C7.1@41.842,-15.746 41.842,-18.576 R3.2@41.91,-18.644 ; J5.4@42.706,19.609 42.706,21.98 R11.2@42.774,22.047 ; v1(28.905,-12.395) 28.931,-12.421 32.791,-12.421 v1(32.817,-12.446) ; v1(32.817,-12.446) v1(35.306,-12.446)
  Bottom Layer w0.381: C22.1@38.786,6.68 36.373,9.093 36.373,10.761 U3.4@35.56,11.574 36.322,11.574 U3.2@41.83,11.574
+5V: C10.1 C13.2 J2.3 J3.3 J4.3 J6.2 J13.3 R5.2 R6.2 R7.2 R8.2 R9.2 R10.2 R39.2 R40.2 U3.3 | length 52.3
  Bottom Layer w0.508: 44.958,1.27 45.035,1.347 J3.3@49.31,1.347 ; 45.009,-6.096 45.081,-6.024 J4.3@49.412,-6.024 ; 45.06,-13.564 45.219,-13.404 J13.3@49.412,-13.404 ; C13.2@47.447,9.131 47.828,8.75 48.094,8.75 48.126,8.718 J2.3@49.31,8.718
  Bottom Layer w0.762: U3.3@42,9.291 42.048,9.243 44.656,9.243 44.704,9.195 C10.1@44.755,9.144 ; C10.1@44.806,8.839 44.806,6.666 45.06,6.412 R6.2@45.094,6.412 ; C10.1@44.831,9.169 47.358,9.169 C13.2@47.447,9.258 ; R5.2@44.89,4.075 44.941,4.075 R5.2@44.967,4.05 ; R6.2@44.992,6.615 44.992,4.075 R5.2@44.967,4.05 ; R9.2@45.043,-10.657 45.043,-19.699 J6.2@47.009,-21.665 ; R10.2@45.043,-7.812 44.992,-7.761 44.992,-3.341 44.941,-3.291 44.941,-0.649 44.916,-0.624 44.916,3.999 R5.2@44.967,4.05 ; R9.2@45.094,-10.403 R10.2@45.094,-7.812
A1: J2.1 R5.1 U1.67 | length 28.4
  VCC w0.203: v1(36.662,-4.099) 36.728,-4.166 40.132,-4.166 43.637,-0.66 43.637,3.708 46.147,6.218 J2.1@49.31,6.218
  Bottom Layer w0.203: U1.67@33.857,-0.837 33.875,-0.856 33.875,-2.591 35.45,-4.166 36.595,-4.166 v1(36.662,-4.099) ; R5.1@47.38,3.771 47.588,3.979 48.327,3.979 49.276,4.928 J2.1@49.276,6.198
A2: J3.1 R7.1 U1.90 | length 19.4
  VCC w0.203: v1(37.948,-8.433) 45.228,-1.153 49.292,-1.153 J3.1@49.327,-1.118
  Bottom Layer w0.203: v1(37.948,-8.433) 38.016,-8.501 38.016,-8.958 38.45,-9.393 U1.90@39.412,-9.393 ; R7.1@47.441,-3.189 47.441,-3.153 48.04,-2.554 48.076,-2.554 49.31,-1.32 J3.1@49.31,-1.153
A3: J4.1 R9.1 U1.92 | length 13.4
  VCC w0.203: v1(40.691,-10.363) 42.53,-8.524 J4.1@49.31,-8.524
  Bottom Layer w0.203: U1.92@39.407,-10.387 39.419,-10.375 40.679,-10.375 v1(40.691,-10.363) ; R9.1@47.38,-10.403 47.507,-10.403 48.04,-9.869 48.04,-9.794 J4.1@49.31,-8.524
A4: J13.1 R39.1 U1.23 | length 27.7
  VCC w0.203: v1(26.856,-14.63) 27.466,-14.021 40.742,-14.021 42.625,-15.904 J13.1@49.306,-15.904
  Bottom Layer w0.203: U1.23@26.857,-15.937 v1(26.856,-14.63) ; R39.1@47.295,-17.831 47.394,-17.831 J13.1@49.32,-15.904 ; J13.1@49.219,-15.904 J13.1@49.31,-15.904
B1: J2.2 R6.1 U1.68 | length 26
  VCC w0.203: v1(36.779,-3.2) 36.83,-3.251 40.03,-3.251 42.875,-0.406 42.875,4.318 46.025,7.468 49.225,7.468 49.267,7.426 J2.2@49.276,7.417
  Bottom Layer w0.203: U1.68@34.357,-0.837 34.376,-0.856 34.376,-1.61 36.017,-3.251 36.728,-3.251 v1(36.779,-3.2) ; R6.1@47.38,6.412 47.54,6.573 48.381,6.573 J2.2@49.327,7.518
B2: J3.2 R8.1 U1.91 | length 21.3
  VCC w0.203: v1(36.881,-8.484) 45.328,-0.036 49.177,-0.036 J3.2@49.31,0.097
  Bottom Layer w0.203: v1(36.881,-8.484) 36.881,-8.534 38.215,-9.869 39.388,-9.869 U1.91@39.407,-9.887 ; R8.1@47.38,-0.446 47.913,0.088 48.149,0.088 48.159,0.097 J3.2@49.31,0.097
B3: J4.2 R10.1 U1.93 | length 16.5
  VCC w0.203: v1(38.034,-10.582) 41.342,-7.274 J4.2@49.31,-7.274
  Bottom Layer w0.203: v1(38.034,-10.582) 38.059,-10.582 38.346,-10.869 39.388,-10.869 U1.93@39.407,-10.887 ; R10.1@47.295,-7.874 47.394,-7.874 R10.1@47.994,-7.274 ; R10.1@47.892,-7.274 J4.2@49.31,-7.274
B4: J13.2 R40.1 U1.24 | length 28.8
  VCC w0.203: v1(25.756,-14.529) 26.873,-13.411 41.148,-13.411 42.391,-14.654 J13.2@49.306,-14.654
  Bottom Layer w0.203: v1(25.756,-14.529) 25.824,-14.597 26.121,-14.597 26.357,-14.832 U1.24@26.357,-15.937 ; R40.1@47.193,-15.138 47.678,-14.654 J13.2@49.412,-14.654
GND1: C1.2 C2.2 C3.2 C4.2 C5.2 C6.2 C7.2 C8.1 C9.1 C10.2 C12.2 C13.1 C15.1 C16.1 C17.1 C18.1 C20.1 C21.2 C22.2 J1.1 J2.4 J3.4 J4.4 J5.1 J6.1 J13.4 J16.1 J17.1 K1.2 LED1.2 R2.2 U1.10 U1.20 U1.27 U1.74 U1.99 U2.15 U3.1 U6.3 U7.3 U9.3 U10.3 U11.3 U13.3 U14.3 U16.3 U18.3 U21.3 | length 124.4
  Top Layer w0.508: v1(40.538,-1.219) LED1.2@41.326,-1.219
  Bottom Layer w0.203: C4.2@21.472,-14.222 21.807,-13.887 U1.27@24.307,-13.887 ; U1.74@37.357,-0.837 37.373,-0.821 37.373,0.492 v1(37.389,0.508) 37.457,0.576 37.457,0.703 38.176,1.422 38.43,1.422 C9.1@37.897,1.956 ; U1.99@39.407,-13.887 41.314,-13.887 ; C7.2@41.415,-13.887 C7.2@41.842,-13.46
  Bottom Layer w0.305: v1@26.871,-30.325 26.871,-29.517 28.181,-28.207 28.588,-28.207 29.007,-27.788 29.134,-27.788 29.616,-27.305 C15.1@29.616,-27.178 29.616,-27.051 32.106,-24.562 32.106,-22.733 C18.1@32.868,-21.971 ; v1(26.873,-30.48) 26.719,-30.325 26.705,-30.325 26.652,-30.378 24.384,-30.378 24.379,-30.373 24.379,-29.642 22.726,-27.988 22.657,-27.988 22.657,-26.172 22.606,-26.121 22.657,-26.071 22.657,-24.414 22.631,-24.389 22.631,-22.631 22.606,-22.606 22.606,-20.777 22.631,-20.752 22.631,-19.329 24.34,-17.62 24.34,-17.244 24.414,-17.17 v1(26.873,-17.17) 26.873,-17.729 27.688,-18.544 28.57,-18.544 28.667,-18.641 28.674,-18.641 C16.1@29.616,-19.583 ; U1.20@28.357,-15.937 28.357,-17.264 28.448,-17.356 v1(28.448,-17.424) 29.314,-18.29 29.397,-18.29 29.548,-18.44 v1(29.616,-18.44) C16.1@29.616,-19.583 ; C16.1@29.616,-19.66 C16.1@29.616,-19.583 ; v1(32.614,-28.6) 32.614,-30.803 v1(32.581,-30.836) 33.014,-31.269 35.679,-31.269 36.07,-30.878 36.07,-30.783 v1@36.119,-30.734 ; v1@32.699,-28.543 32.639,-28.483 32.639,-27 v1(32.664,-26.975) 32.664,-25.128 32.588,-25.052 32.588,-23.419 32.819,-23.188 32.819,-23.01 v1(32.868,-22.962) C18.1@32.868,-21.971 ; U1.10@33.357,-15.937 33.357,-16.986 33.018,-17.325 33.018,-17.358 32.951,-17.424 32.918,-17.424 31.852,-18.491 31.852,-20.396 33.02,-21.565 C18.1@33.02,-21.692 32.868,-21.844 C18.1@32.868,-21.971 ; C17.1@35.763,-21.692 C17.1@35.763,-21.565 ; v1(35.865,-17.323) v1(36.83,-18.288) 36.881,-18.288 36.881,-20.447 C17.1@35.763,-21.565 ; v1@36.001,-30.734 36.119,-30.617 v1@36.119,-28.88 ; v1(36.119,-28.753) 36.119,-27.348 36.017,-27.247 v1(36.017,-27.178) 36.043,-27.153 36.043,-25.121 36.093,-25.07 36.093,-23.259 35.966,-23.132 35.966,-21.768 C17.1@35.763,-21.565
  Bottom Layer w0.508: U2.15@30.255,3.049 30.26,3.053 31.45,3.053 32.207,3.81 C12.2@33.426,3.81 ; v1(40.538,-1.219) 41.326,-1.219 41.326,-1.372 C6.2@41.605,-1.651 ; J1.1@49.424,15.384 J1.1@49.432,15.392
  Bottom Layer w0.762: U13.3@15.16,-2.083 15.388,-1.854 v1(16.866,-1.854) ; U21.3@15.443,-36.17 15.545,-36.271 v1(17.12,-36.271) ; U16.3@15.443,-19.202 v1(17.018,-19.202) ; U7.3@15.443,32.309 v1(17.17,32.309) ; U10.3@15.545,15.138 15.596,15.189 v1(17.221,15.189) ; v1(18.034,9.906) 18.058,9.882 C20.1@19.592,9.882 ; v1(19.202,-4.928) 19.253,-4.877 C5.2@19.253,-0.762 ; v1(21.488,-15.951) C4.2@21.488,-14.224 ; C12.2@33.477,3.81 33.68,4.013 v1(33.68,4.978) 33.68,5.004 C22.2@35.204,6.528 ; v1(41.961,-27.788) C21.2@41.961,-26.365 ; C7.2@41.961,-13.648 42.012,-13.597 v1(42.012,-12.395) ; R2.2@41.961,-8.433 v1(41.961,-6.604) ; U3.1@42,13.891 42.368,13.523 43.881,13.523 44.45,12.954 44.475,12.954 C10.2@44.831,12.598 45.212,12.217 45.212,12.13 45.658,11.684 47.46,11.684 47.701,11.925 48.501,11.925 49.424,12.848 J1.1@49.424,15.384 ; U3.1@42.246,13.899 U3.1@42.246,13.939 ; C13.1@47.447,11.544 C13.1@47.447,11.671
  other v1: 23.165,-37.694 36.119,-30.836 24.384,-30.48 28.6,-28.194 22.606,-27.92 22.606,-26.197 31.344,-25.4 32.664,-25.197 36.068,-25.095 22.606,-24.473 32.055,-23.673 35.966,-23.063 22.606,-22.75 22.606,-21.027 32.004,-20.574 36.932,-20.422 22.606,-19.304 28.55,-18.593 31.902,-18.491 32.969,-17.475 24.389,-17.17 27.076,15.85 49.886,17.424 24.083,21.819 23.825,27.635 21.946,38.557
GND2: C26.2 C27.1 C28.1 C29.2 C30.2 C31.2 C32.2 D3.2 D4.2 D7.2 D8.2 D11.2 D12.2 D15.2 D16.2 D20.2 D21.2 R29.2 R41.2 R42.2 TVS1.1 U4.1 U4.2 U4.10 U4.11 U4.19 U4.20 U5.6 U5.7 U6.5 U7.5 U8.1 U8.2 U8.10 U8.11 U8.19 U8.20 U9.5 U10.5 U11.5 U12.1 U12.2 U12.10 U12.11 U12.19 U12.20 U13.5 U14.5 U15.1 U15.2 U15.10 U15.11 U15.19 U15.20 U16.5 U18.5 U20.1 U20.2 U20.10 U20.11 U20.19 U20.20 U21.5 U22.2 U23.2 | length 124.6
  Top Layer w0.508: v2(-17.221,-23.876) -16.16,-22.815 U15.10@-13.542,-22.815 ; v2(-16.662,-28.499) -16.635,-28.499 -16.557,-28.577 -13.535,-28.577 -13.581,-28.623 U20.2@-13.581,-29.847 ; U20.10@-13.581,-40.007 U20.11@-0.859,-40.007 -0.864,-40.012 v2(-0.864,-41.351) ; U15.2@-13.542,-12.655 U15.1@-13.542,-11.385 -10.853,-11.385 -10.746,-11.278 v2(-10.719,-11.278) ; U12.10@-13.542,-5.69 -13.521,-5.71 -10.98,-5.71 -10.899,-5.791 v2(-10.871,-5.791) ; U12.2@-13.542,4.47 U12.1@-13.542,5.74 v1(-10.871,5.74) ; U8.10@-13.542,11.435 -13.539,11.433 -10.721,11.433 v1(-10.719,11.43) ; U8.2@-13.542,21.595 -13.542,22.831 U8.1@-13.513,22.86 ; U8.1@-13.542,22.865 -13.539,22.863 -10.671,22.863 v1(-10.668,22.86) ; U4.10@-13.542,28.635 -13.534,28.643 -10.32,28.643 v1(-10.312,28.651) ; U4.2@-13.542,38.913 U4.1@-13.542,40.065 ; U4.1@-13.513,40.081 -13.505,40.073 -10.371,40.073 v2(-10.363,40.081) ; v1(-4.013,-28.6) -3.999,-28.6 -3.976,-28.577 U20.20@-0.859,-28.577 ; v2(-3.708,40.03) -3.681,40.03 -3.638,40.073 -0.828,40.073 U4.20@-0.82,40.065 ; v1(-3.658,28.55) -3.644,28.55 -3.558,28.635 U4.11@-0.82,28.635 ; v1(-3.607,11.379) -3.593,11.379 -3.537,11.435 U8.11@-0.82,11.435 ; v2(-3.505,-5.69) U12.11@-0.82,-5.69 ; v1(-3.454,-22.809) -3.452,-22.812 -0.822,-22.812 U15.11@-0.82,-22.815 ; v1(-3.454,5.74) -0.66,5.74 -0.66,4.516 -0.706,4.47 U12.19@-0.82,4.47 ; v2(-3.353,-11.328) -3.325,-11.328 -3.269,-11.385 U15.20@-0.82,-11.385 ; U20.20@-0.864,-28.6 -0.859,-28.605 U20.19@-0.859,-29.847 ; U15.19@-0.82,-12.655 -0.757,-12.655 -0.711,-12.609 U15.20@-0.711,-11.385 ; U8.19@-0.82,21.595 -0.757,21.595 -0.711,21.641 -0.711,22.865 -0.716,22.865 -0.762,22.911 v1(-0.762,23.673) ; U4.19@-0.82,38.795 U4.20@-0.82,39.984 ; U20.20@-0.813,-28.6 U20.20@-0.762,-28.55
  Top Layer w0.762: v2(3.556,3.048) U11.5@5.465,3.048 ; v2(3.556,37.44) U6.5@5.436,37.44 ; v1(3.581,-31.09) U18.5@5.501,-31.09 ; v1(3.581,-13.919) 5.315,-13.919 U14.5@5.415,-14.019 ; v2(3.607,20.269) U9.5@5.537,20.269
  Top Layer w1.27: D20.2@-24.994,-28.483 -24.927,-28.55 D21.2@-20.93,-28.55 ; D15.2@-24.994,-10.45 -20.995,-10.45 D16.2@-20.879,-10.566 ; D11.2@-24.994,4.434 -20.9,4.434 -20.893,4.434 D12.2@-20.879,4.42 ; D7.2@-24.994,21.655 -20.966,21.655 D8.2@-20.93,21.692 ; D3.2@-24.587,41.468 D4.2@-20.552,41.468 -20.625,41.541 v2(-20.625,42.926) ; D21.2@-20.9,-28.483 -19.508,-27.091 -19.508,-25.756 U5.7@-19.177,-25.425
  Bottom Layer w0.762: U16.5@5.44,-21.692 v2(7.772,-21.692) ; U21.5@5.559,-38.753 7.918,-38.753 v2(7.925,-38.76) ; U7.5@5.56,29.774 7.868,29.774 v2(7.874,29.769) ; U10.5@5.668,12.548 v2(8.026,12.548) ; U13.5@5.681,-4.521 v2(7.772,-4.521)
  other v1: -26.264,-50.851 -15.342,-50.14 -11.735,-50.14 -25.806,-46.126 -32.41,-44.602 -33.833,-41.961
  other v2: -6.452,-40.03 -22.758,-28.55 -22.911,-10.363 -22.962,4.42 -22.962,21.692
IN1: R12.2 U4.7 U6.6 | length 28.2
  Top Layer w0.508: U4.7@-13.542,32.445 -13.534,32.453 -6.561,32.453 v1(-6.553,32.461) ; v2(3.556,34.9) 5.552,34.9 U6.6@5.559,34.892 7.671,34.892 8.128,35.35 8.128,40.057 7.747,40.438 R12.2@7.663,40.438
  Bottom Layer w0.508: v1(-6.553,32.461) -4.115,34.9 v2(3.556,34.9)
IN2: R15.2 U4.9 U7.6 | length 30.1
  Top Layer w0.508: U4.9@-13.542,29.905 -6.596,29.905 -6.53,29.972 v2(-6.502,29.972)
  Bottom Layer w0.508: v2(-6.502,29.972) -4.211,32.264 U7.6@5.56,32.264 ; U7.6@5.56,32.314 7.379,32.314 7.676,32.612 R15.2@7.676,40.438
IN3: R17.2 U8.7 U9.6 | length 28.5
  Top Layer w0.508: U8.7@-13.542,15.245 -13.539,15.243 -10.721,15.243 v2(-10.719,15.24) ; v2(3.556,17.729) 5.603,17.729 5.661,17.671 7.932,17.671 8.23,17.969 8.23,22.941 7.849,23.322 R17.2@7.765,23.322
  Bottom Layer w0.508: v2(-10.719,15.24) -10.699,15.259 -9.023,15.259 -6.553,17.729 v2(3.556,17.729)
IN4: R20.2 U8.9 U10.6 | length 30
  Top Layer w0.508: U8.9@-13.542,12.705 -13.539,12.703 -10.671,12.703 v2(-10.668,12.7)
  Bottom Layer w0.508: v2(-10.668,12.7) -8.484,12.7 -6.154,15.03 U10.6@5.661,15.03 ; U10.6@5.661,15.08 6.297,15.716 7.467,15.716 7.765,16.014 R20.2@7.765,23.322
IN5: R22.2 U11.6 U12.7 | length 28.3
  Top Layer w0.508: U12.7@-13.542,-1.88 -10.898,-1.88 v2(-10.852,-1.834) ; v2(3.556,0.559) 5.501,0.559 5.559,0.501 7.518,0.501 8.077,1.06 8.077,5.876 7.696,6.257 R22.2@7.663,6.257
  Bottom Layer w0.508: v2(-10.852,-1.834) -8.641,-1.834 -6.248,0.559 v2(3.556,0.559)
IN6: R24.2 U12.9 U13.6 | length 30.3
  Top Layer w0.508: U12.9@-13.542,-4.42 -11.024,-4.42 v2(-10.981,-4.377)
  Bottom Layer w0.508: v2(-10.981,-4.377) -8.085,-4.377 -5.862,-2.153 U13.6@5.56,-2.153 ; U13.6@5.56,-2.103 7.366,-2.103 7.663,-1.805 R24.2@7.663,6.257
IN7: R27.2 U14.6 U15.7 | length 28.1
  Top Layer w0.508: U15.7@-13.542,-19.005 -10.775,-19.005 v2(-10.77,-18.999) ; v2@3.537,-16.529 v2(3.556,-16.51) 5.366,-16.51 5.415,-16.559 7.678,-16.559 7.976,-16.262 7.976,-11.08 7.595,-10.699 R27.2@7.519,-10.699
  Bottom Layer w0.508: v2(-10.77,-18.999) -8.128,-18.999 -5.69,-16.561 3.2,-16.561
IN8: R30.2 U15.9 U16.6 | length 30.4
  Top Layer w0.508: U15.9@-13.542,-21.545 -11.013,-21.545 v2(-10.981,-21.577)
  Bottom Layer w0.508: v2(-10.981,-21.577) -6.997,-21.577 -4.647,-19.226 U16.6@5.416,-19.226 ; U16.6@5.416,-19.176 7.222,-19.176 7.519,-18.878 R30.2@7.519,-10.699
IN9: R34.2 U18.6 U20.7 | length 28.1
  Top Layer w0.508: U20.7@-13.581,-36.197 -9.679,-36.197 v1(-7.112,-33.63) ; v2(3.556,-33.63) 5.554,-33.63 5.599,-33.584 7.83,-33.584 8.128,-33.287 8.128,-28.66 7.747,-28.279 R34.2@7.663,-28.279
  Bottom Layer w0.508: v1(-7.112,-33.63) v2@3.529,-33.63